# EAGLE board MonochromeVGA (EAGLE 7.6.0)
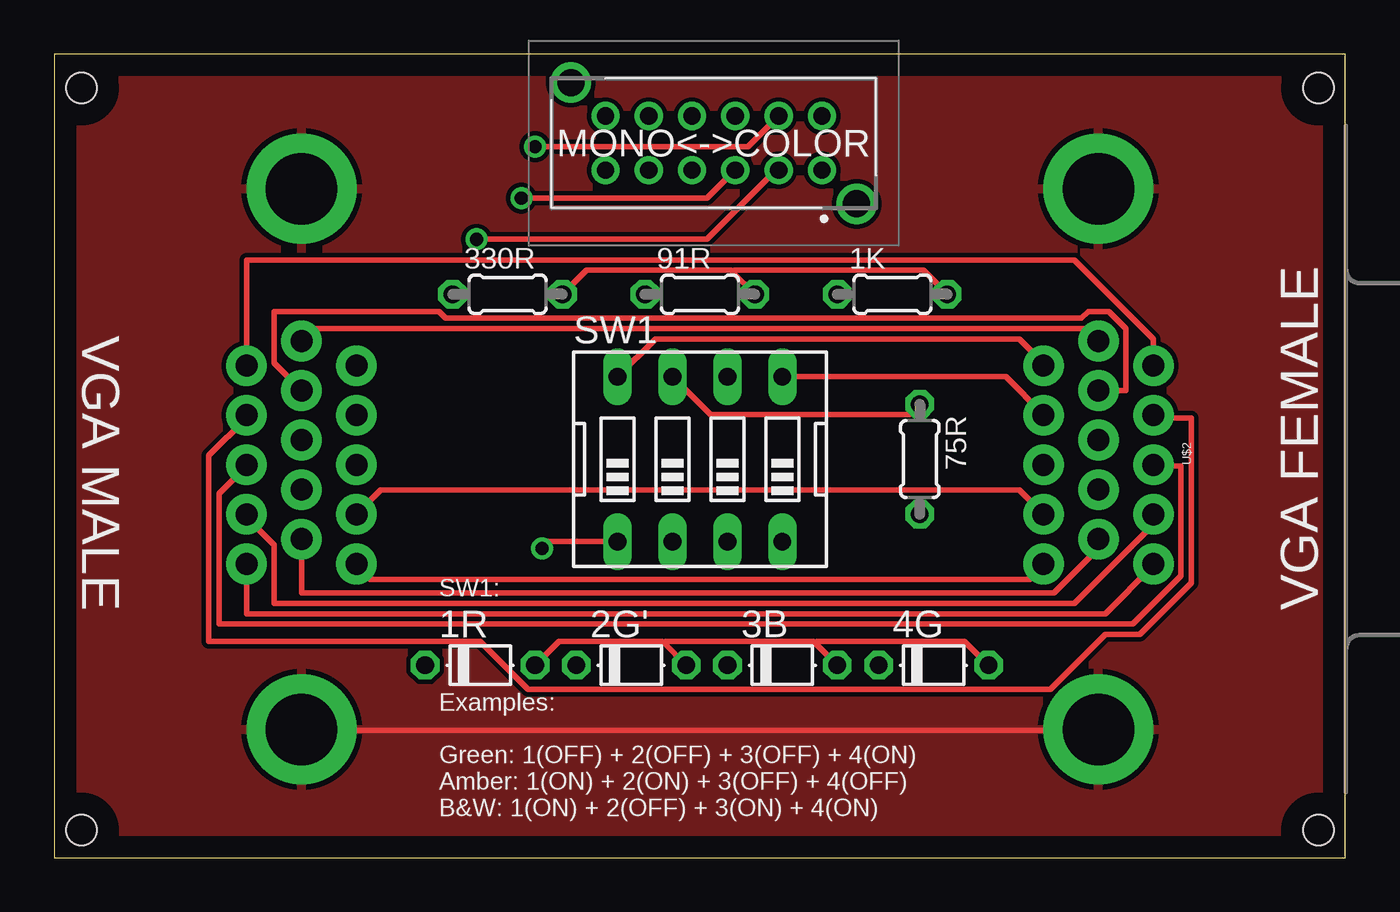
[diagram p0: board, top side]
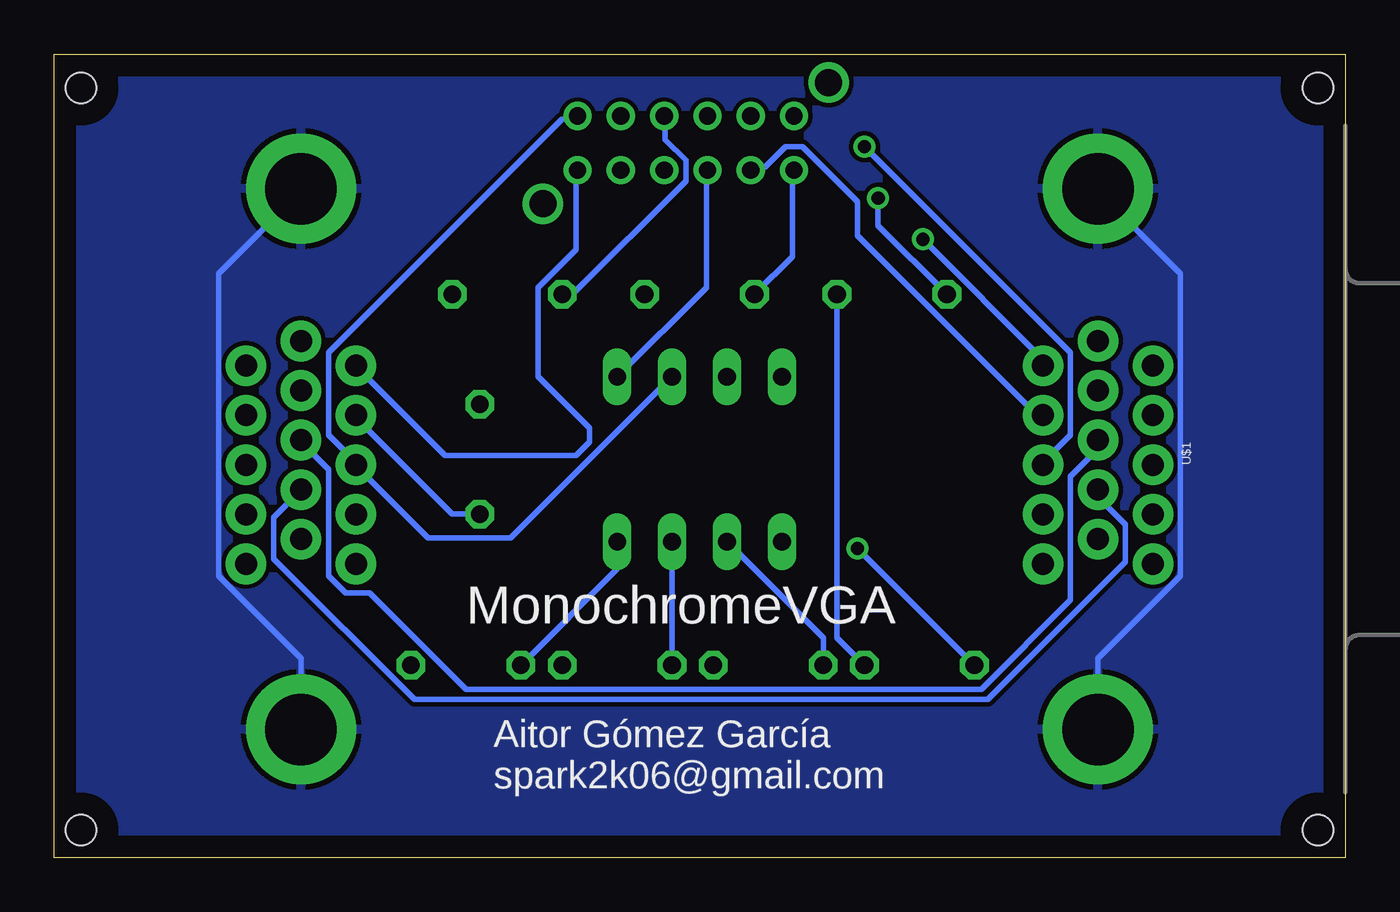
[diagram p1: board, bottom side, seen from below]

Size 59.67 x 37.13 mm. Coordinates in mm from the lower left corner, seen from the top.
Outline: 0,0 59.67,0 59.67,37.13 0,37.13 0,0
Copper layers (1*16): Top 0.035mm / dielectric 1.5mm / Bottom 0.035mm
Design rules "default": minimum track width 10mil, minimum drill 24mil, track to track 8mil, track to pad 8mil, pad to pad 8mil, via to via 8mil, smd to smd 8mil, copper to edge 40mil, drill to drill 8mil, minimum pad ring 10mil, minimum via ring 8mil, stop-mask expansion 4mil, vias tented up to drill 0mil, thermal gap 10mil
Holes 1.4 mm at 1.27,35.56 58.42,35.56 1.27,1.27 58.42,1.27

## Footprints (pad centres in the part's own frame; a part is rotated, then mirrored left to right if it is on the bottom)
0204/5 = drill 0.813 octagon: 1 -2.54,0; 2 2.54,0
D-5 = drill 0.813 octagon: A 2.54,0; C -2.54,0
EG4208A = drill 0.8 pad 1.3: 1 -5,1.25; 2 -3,1.25; 3 -1,1.25; 4 1,1.25; 5 3,1.25; 6 5,1.25; 7 -5,-1.25; 8 -3,-1.25; 9 -1,-1.25; 10 1,-1.25; 11 3,-1.25; 12 5,-1.25 | drill 1.25 pad 1.875: 13 -6.6,2.8; 14 6.6,-2.8
EDG-04 = drill 0.813 long: 1 -3.81,-3.81; 2 -1.27,-3.81; 3 1.27,-3.81; 4 3.81,-3.81; 5 3.81,3.81; 6 1.27,3.81; 7 -1.27,3.81; 8 -3.81,3.81
DB15 = drill 1.016 pad 1.88: 1 -4.32,-7.62; 2 -2.03,-7.62; 3 0.26,-7.62; 4 2.55,-7.62; 5 4.84,-7.62; 6 -5.46,-5.08; 7 -3.17,-5.08; 8 -0.88,-5.08; 9 1.41,-5.08; 10 3.7,-5.08; 11 -4.32,-2.54; 12 -2.03,-2.54; 13 0.26,-2.54; 14 2.55,-2.54; 15 4.84,-2.54 | drill 3.302 pad 5.08: G1 -12.5,-5.08; G2 12.5,-5.08

## Placement (x,y rotation side)
1K  [0204/5]  38.74,26.04 0 top
1R  [D-5]  19.68,8.89 0 top
2G'  [D-5]  26.67,8.89 0 top
3B  [D-5]  33.66,8.89 0 top
4G  [D-5]  40.64,8.89 0 top
75R  [0204/5]  40.01,18.41 270 top
91R  [0204/5]  29.84,26.04 0 top
330R  [0204/5]  20.95,26.04 0 top
MONO<->COLOR  MONO<->COLOR  [EG4208A]  30.48,33.02 180 top
SW1  [EDG-04]  29.84,18.41 0 top
U$1  [DB15]  6.35,18.41 270 bottom
U$2  [DB15]  53.34,18.41 270 top

## Library data of the parts
1K 75R 91R 330R = resistor
1R 2G' 3B 4G = diode
MONO<->COLOR = EG4208A; DESCRIPTION: Slide Switches 4P2T SIDE OP PC MNT; HEIGHT: 5mm; MANUFACTURER_NAME: E-Switch; MANUFACTURER_PART_NUMBER: EG4208A; MOUSER_PART_NUMBER: 612-EG4208A; MOUSER_PRICE-STOCK: https://www.mouser.com/Search/Refine.aspx?Keyword=612-EG4208A
SW1 = special
U$1 U$2 = SparkFun-Connectors

## Nets
B_IN: MONO<->COLOR.8 U$1.3
B_L: 1K.1 MONO<->COLOR.9
B_OUT: MONO<->COLOR.7 SW1.6 U$2.3
DB15_4: U$1.4 U$2.4
DB15_5: U$1.5 U$2.5
DB15_6: U$1.6 U$2.6
DB15_7: U$1.7 U$2.7
DB15_8: U$1.8 U$2.8
DB15_9: U$1.9 U$2.9
DB15_10: U$1.10 U$2.10
DB15_11: U$1.11 U$2.11
DB15_12: U$1.12 U$2.12
DB15_13: U$1.13 U$2.13
DB15_14: U$1.14 U$2.14
DB15_15: U$1.15 U$2.15
G_3/4: 75R.1 SW1.7
G_IN: MONO<->COLOR.5 U$1.2
G_L: 91R.1 MONO<->COLOR.6
G_OUT: 75R.2 MONO<->COLOR.4 SW1.5 U$2.2
GND: U$1.G1 U$1.G2 U$2.G1 U$2.G2
LUMA: 1K.2 1R.A 2G'.A 3B.A 4G.A 91R.2 330R.2
N$3: 2G'.C SW1.2
N$4: 3B.C SW1.3
N$5: 4G.C SW1.4
N$6: 1R.C SW1.1
R_IN: MONO<->COLOR.2 U$1.1
R_L: 330R.1 MONO<->COLOR.3
R_OUT: MONO<->COLOR.1 SW1.8 U$2.1

## Tracks (layer width: path | path; a pad name or v marks a point on that pad's centre or on a via)
B_IN  (via drill 0.61)
  Top 0.254: v22.22,32.86 32.07,32.86 33.34,34.13 MONO<->COLOR.8
  Bottom 0.254: v22.22,32.86 12.7,23.34 12.7,19.53 13.97,18.26 U$1.3
B_L
  Bottom 0.254: 1K.1 35.72,26.04 30.48,31.27 30.48,32.23 31.43,33.18 31.43,34.13 MONO<->COLOR.9
B_OUT
  Bottom 0.254: MONO<->COLOR.7 35.56,34.13 36.2,34.13 46.99,23.34 46.99,19.53 45.72,18.26 U$2.3 45.72,18.1 42.39,14.76 38.58,14.76 SW1.6
DB15_4
  Top 0.254: U$1.4 15.08,16.99 44.61,16.99 U$2.4
DB15_5
  Top 0.254: U$1.5 13.97,13.49 14.61,12.86 45.09,12.86 45.72,13.49 U$2.5
DB15_6
  Top 0.254: U$1.6 11.43,23.97 11.91,24.45 47.78,24.45 48.26,23.97 U$2.6
DB15_7
  Top 0.254: U$1.7 10.16,22.86 10.16,25.24 17.78,25.24 18.1,24.92 47.47,24.92 47.78,25.24 48.74,25.24 49.53,24.45 49.53,21.59 U$2.7
DB15_8
  Bottom 0.254: U$1.8 11.43,18.89 12.7,17.62 12.7,11.91 16.83,7.78 40.64,7.78 45.09,12.22 46.2,12.22 46.99,13.02 46.99,17.94 48.26,19.21 U$2.8
DB15_9
  Bottom 0.254: U$1.9 11.43,16.67 10.16,15.4 10.16,13.65 16.51,7.3 43.02,7.3 49.53,13.81 49.53,15.72 48.26,16.99 U$2.9
DB15_10
  Top 0.254: U$1.10 11.43,12.22 46.2,12.22 48.26,14.29 U$2.10
DB15_11
  Top 0.254: U$1.11 8.89,27.62 47.15,27.62 50.8,23.97 U$2.11
DB15_12
  Top 0.254: U$1.12 8.89,20.32 7.14,18.57 7.14,10 19.68,10 21.91,7.78 46.04,7.78 48.58,10.32 50.17,10.32 52.55,12.7 52.55,20.32 50.8,20.32 U$2.12
DB15_13
  Top 0.254: U$1.13 8.89,18.1 7.62,16.83 7.62,10.8 49.85,10.8 52.07,13.02 52.07,18.1 50.8,18.1 U$2.13
DB15_14
  Top 0.254: U$2.14 50.8,15.4 47.15,11.75 10.16,11.75 10.16,14.45 8.89,15.72 U$1.14
DB15_15
  Top 0.254: U$1.15 8.89,11.27 48.58,11.27 50.8,13.49 U$2.15
G_3/4
  Top 0.254: SW1.7 30.32,20.48 39.53,20.48 75R.1
G_IN
  Bottom 0.254: MONO<->COLOR.5 27.46,31.91 26.83,31.91 25.88,32.86 25.08,32.86 22.54,30.32 22.54,28.73 14.29,20.48 13.97,20.48 U$1.2
G_L
  Bottom 0.254: 91R.1 25.56,27.78 25.56,31.75 MONO<->COLOR.6
G_OUT
  Top 0.254: SW1.5 43.97,22.23 45.72,20.48 U$2.2
  Bottom 0.254: 75R.2 41.28,15.88 45.72,20.32 U$2.2 | SW1.5 29.53,26.35 29.53,31.75 MONO<->COLOR.4
GND
  Top 0.254: U$1.G2 11.43,5.87 48.26,5.87 U$2.G2
  Bottom 0.254: U$1.G2 11.43,9.21 7.62,13.02 7.62,26.99 11.43,30.8 U$1.G1 | U$2.G2 48.26,9.21 52.07,13.02 52.07,26.99 48.26,30.8 U$2.G1
  pour Bottom: 0,36.83 59.69,36.83 59.69,0 0,0
  pour Top: 0,36.83 59.69,36.83 59.69,0 0,0
LUMA
  Top 0.254: 330R.2 24.61,27.15 31.27,27.15 31.35,27.07 | 91R.2 31.35,27.07 | 1K.2 40.16,27.15 31.43,27.15 31.35,27.07 | 1R.A 23.34,10 28.1,10 28.18,9.92 | 2G'.A 28.18,9.92 | 35.16,9.92 35.08,10 28.26,10 28.18,9.92 | 35.16,9.92 3B.A | 4G.A 42.07,10 35.24,10 35.16,9.92
  Bottom 0.254: 330R.2 23.5,10.16 1R.A
N$3
  Bottom 0.254: 2G'.C 24.13,10.16 SW1.2
N$4
  Bottom 0.254: SW1.3 3B.C
N$5
  Bottom 0.254: SW1.4 33.66,13.34 4G.C
N$6  (via drill 0.61)
  Top 0.254: v22.54,14.29 22.86,14.6 SW1.1
  Bottom 0.254: v22.54,14.29 1R.C
R_IN  (via drill 0.61)
  Top 0.254: v19.53,28.57 30.16,28.57 33.34,31.75 MONO<->COLOR.2
  Bottom 0.254: v19.53,28.57 13.97,23.02 U$1.1
R_L  (via drill 0.61)
  Top 0.254: v21.59,30.48 30.16,30.48 31.43,31.75 MONO<->COLOR.3
  Bottom 0.254: v21.59,30.48 21.59,29.21 330R.1
R_OUT
  Top 0.254: SW1.8 27.78,23.97 44.61,23.97 45.72,22.86 U$2.1
  Bottom 0.254: MONO<->COLOR.1 35.56,31.75 35.56,28.1 37.31,26.35 37.31,22.23 34.93,19.84 34.93,19.21 35.56,18.57 41.59,18.57 45.72,22.7 U$2.1

## Text on the board
tPlace: VGA MALE | SW1: | VGA FEMALE | Examples: / / Green: 1(OFF) + 2(OFF) + 3(OFF) + 4(ON) / Amber: 1(ON) + 2(ON) + 3(OFF) + 4(OFF) / B&W: 1(ON) + 2(OFF) + 3(ON) + 4(ON)
bPlace: MonochromeVGA | Aitor Gómez García | spark2k06@gmail.com